# EAGLE board cerberus (EAGLE 7.5.0)
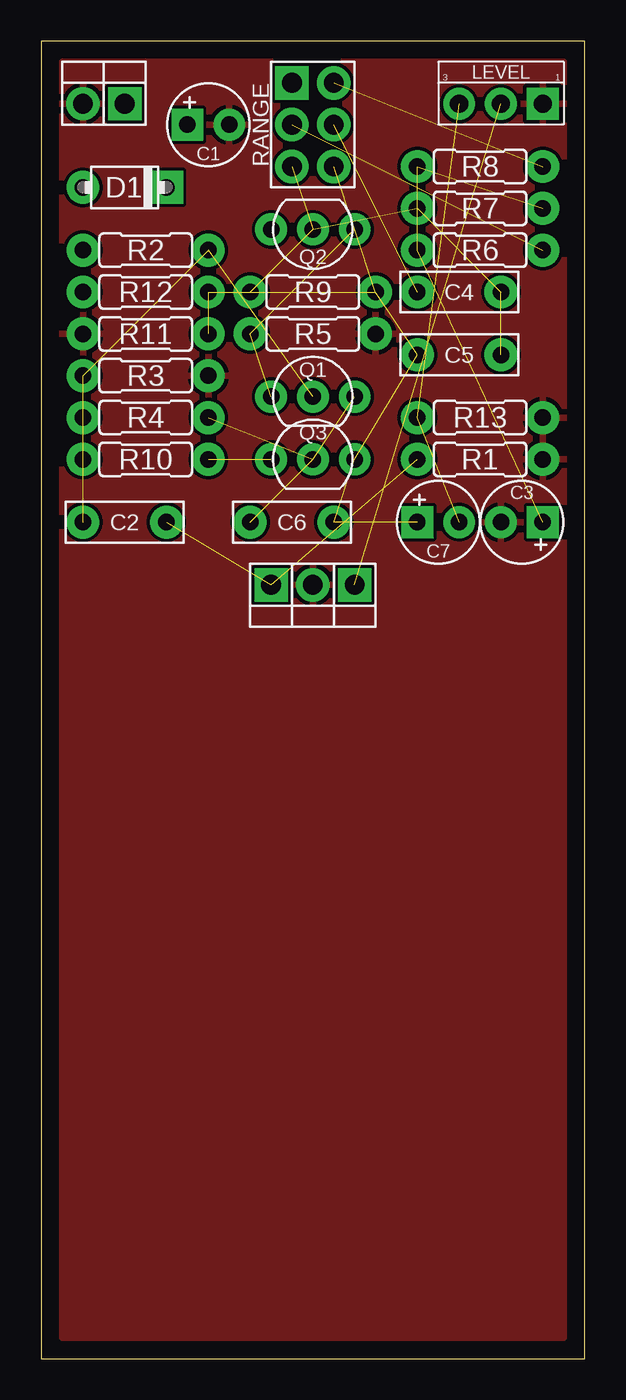
[diagram p0: board, top side]
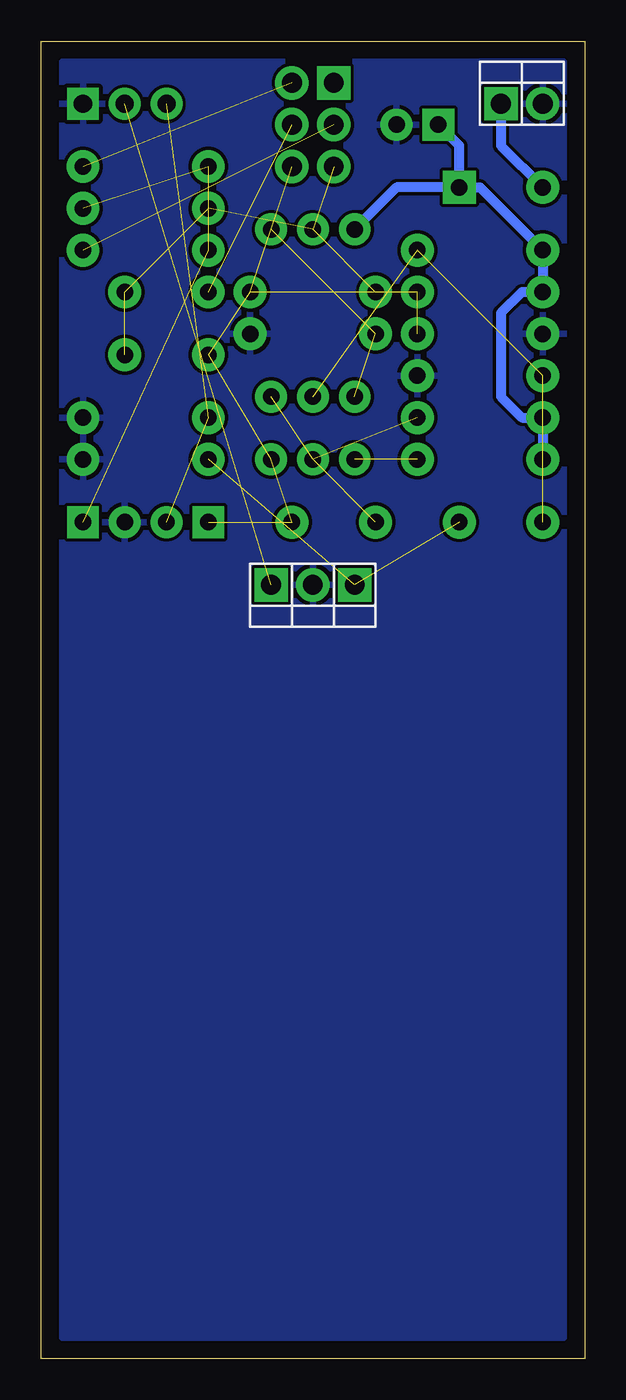
[diagram p1: board, bottom side, seen from below]

Size 33.02 x 80 mm. Coordinates in mm from the lower left corner, seen from the top.
Outline: 0,0 33.02,0 33.02,80 0,80 0,0
Copper layers (1*16): Top 0.035mm / dielectric 1.5mm / Bottom 0.035mm
Design rules "default": minimum track width 10mil, minimum drill 24mil, track to track 8mil, track to pad 8mil, pad to pad 8mil, via to via 8mil, smd to smd 8mil, copper to edge 40mil, drill to drill 8mil, minimum pad ring 10mil, minimum via ring 8mil, stop-mask expansion 4mil, vias tented up to drill 0mil, thermal gap 10mil

## Footprints (pad centres in the part's own frame; a part is rotated, then mirrored left to right if it is on the bottom)
050_020_1 = drill 1 pad 1.93 square: + -1.27,0 | drill 1 pad 1.93: - 1.27,0
BOX_SMALL = drill 1 pad 2: 1 -2.54,0; 2 2.54,0
DO41-2 = drill 1 pad 2: A 2.54,0 | drill 1 pad 2 square: C -2.54,0
PADS_SMALL = drill 1.1 pad 1.93 square: 1 2.54,0 | drill 1.1 pad 1.93: 2 0,0; 3 -2.54,0
SQUARE = drill 1.2 pad 2.032 square: 1 0,0
ROUND = drill 1.2 pad 2.032: 1 0,0
TO92- = drill 1 pad 1.93: 1 2.54,0; 2 0,0; 3 -2.54,0
R0207/3 = drill 1 pad 2: 1 -3.81,0; 2 3.81,0
DPDT = drill 1.2 pad 2.032 square: A1 -1.27,2.54 | drill 1.2 pad 2.032: A2 -1.27,0; A3 -1.27,-2.54; B1 1.27,2.54; B2 1.27,0; B3 1.27,-2.54

## Placement (x,y rotation side)
C1  100u  [050_020_1]  10.16,74.93 0 top
C2  47n  [BOX_SMALL]  5.08,50.8 0 top
C3  4u7  [050_020_1]  29.21,50.8 180 top
C4  10n  [BOX_SMALL]  25.4,64.77 0 top
C5  10p  [BOX_SMALL]  25.4,60.96 0 top
C6  10p  [BOX_SMALL]  15.24,50.8 180 top
C7  4u7  [050_020_1]  24.13,50.8 0 top
D1  1N5817  [DO41-2]  5.08,71.12 180 top
LEVEL  10kA  [PADS_SMALL]  27.94,76.2 0 top
PAD1  PADSQR  [SQUARE]  5.08,76.2 180 top
PAD2  PADSQR  [SQUARE]  13.97,46.99 0 top
PAD3  PADRND  [ROUND]  2.54,76.2 180 top
PAD4  PADRND  [ROUND]  16.51,46.99 0 top
PAD5  PADSQR  [SQUARE]  19.05,46.99 0 top
Q1  2N5088  [TO92-]  16.51,58.42 0 top
Q2  2N5088  [TO92-]  16.51,68.58 180 top
Q3  2N5087  [TO92-]  16.51,54.61 0 top
R1  1M  [R0207/3]  26.67,54.61 180 top
R2  220k  [R0207/3]  6.35,67.31 180 top
R3  220k  [R0207/3]  6.35,59.69 180 top
R4  3k  [R0207/3]  6.35,57.15 180 top
R5  10k  [R0207/3]  16.51,62.23 180 top
R6  8k2  [R0207/3]  26.67,67.31 180 top
R7  27k  [R0207/3]  26.67,69.85 180 top
R8  10k  [R0207/3]  26.67,72.39 0 top
R9  100k  [R0207/3]  16.51,64.77 0 top
R10  47R  [R0207/3]  6.35,54.61 180 top
R11  8k2  [R0207/3]  6.35,62.23 0 top
R12  100k  [R0207/3]  6.35,64.77 180 top
R13  2M2***  [R0207/3]  26.67,57.15 180 top
RANGE  DPDT  [DPDT]  16.51,74.93 0 top

## Library data of the parts
C1 C3 C7 = capacitors-elec
C2 C4-C6 = capacitors-film
D1 = diodes
LEVEL = potentiometers
PAD1-PAD5 = supply pins
Q1-Q3 = transistors
R1-R13 = resistors
RANGE = switches

## Nets
+9V: D1.A PAD1.1
GND: C1.- C3.- LEVEL.1 PAD3.1 PAD4.1 R1.1 R3.1 R5.1 R11.1 R13.1
IN: C2.2 PAD2.1 R1.2
N$1: C2.1 Q1.2 R2.1 R3.2
N$2: Q3.3 R10.1
N$3: C7.- LEVEL.3 R13.2
N$4: C6.2 Q1.1 Q3.2 R4.1
N$5: Q1.3 Q2.3 R5.2
N$6: C5.1 C6.1 C7.+ Q3.1 R9.2 R11.2 R12.1 RANGE.B3
N$7: C1.+ D1.C Q2.1 R2.2 R4.2 R10.2 R12.2
N$8: R6.1 RANGE.A2
N$9: C4.1 RANGE.B2
N$10: C4.2 C5.2 Q2.2 R7.2 R9.1 RANGE.A3
N$12: C3.+ R6.2 R7.1 R8.1
N$14: R8.2 RANGE.B1
OUT: LEVEL.2 PAD5.1

## Tracks (layer width: path | path; a pad name or v marks a point on that pad's centre or on a via)
+9V
  Bottom 0.61: PAD1.1 5.08,73.66 D1.A
GND
  pour Bottom: 1.27,78.74 31.75,78.74 31.75,1.27 1.27,1.27
  pour Top: 1.27,78.74 31.75,78.74 31.75,1.27 1.27,1.27
IN  (2 unrouted)
N$1  (3 unrouted)
N$2  (1 unrouted)
N$3  (2 unrouted)
N$4  (3 unrouted)
N$5  (2 unrouted)
N$6  (7 unrouted)
N$7
  Bottom 0.61: D1.C 7.62,73.66 C1.+ | D1.C 11.43,71.12 Q2.1 | D1.C 6.35,71.12 R2.2 R12.2 3.81,64.77 5.08,63.5 5.08,58.42 3.81,57.15 R4.2 R10.2
N$8  (1 unrouted)
N$9  (1 unrouted)
N$10  (5 unrouted)
N$12  (3 unrouted)
N$14  (1 unrouted)
OUT  (1 unrouted)